# EAGLE board test (EAGLE 4.16)
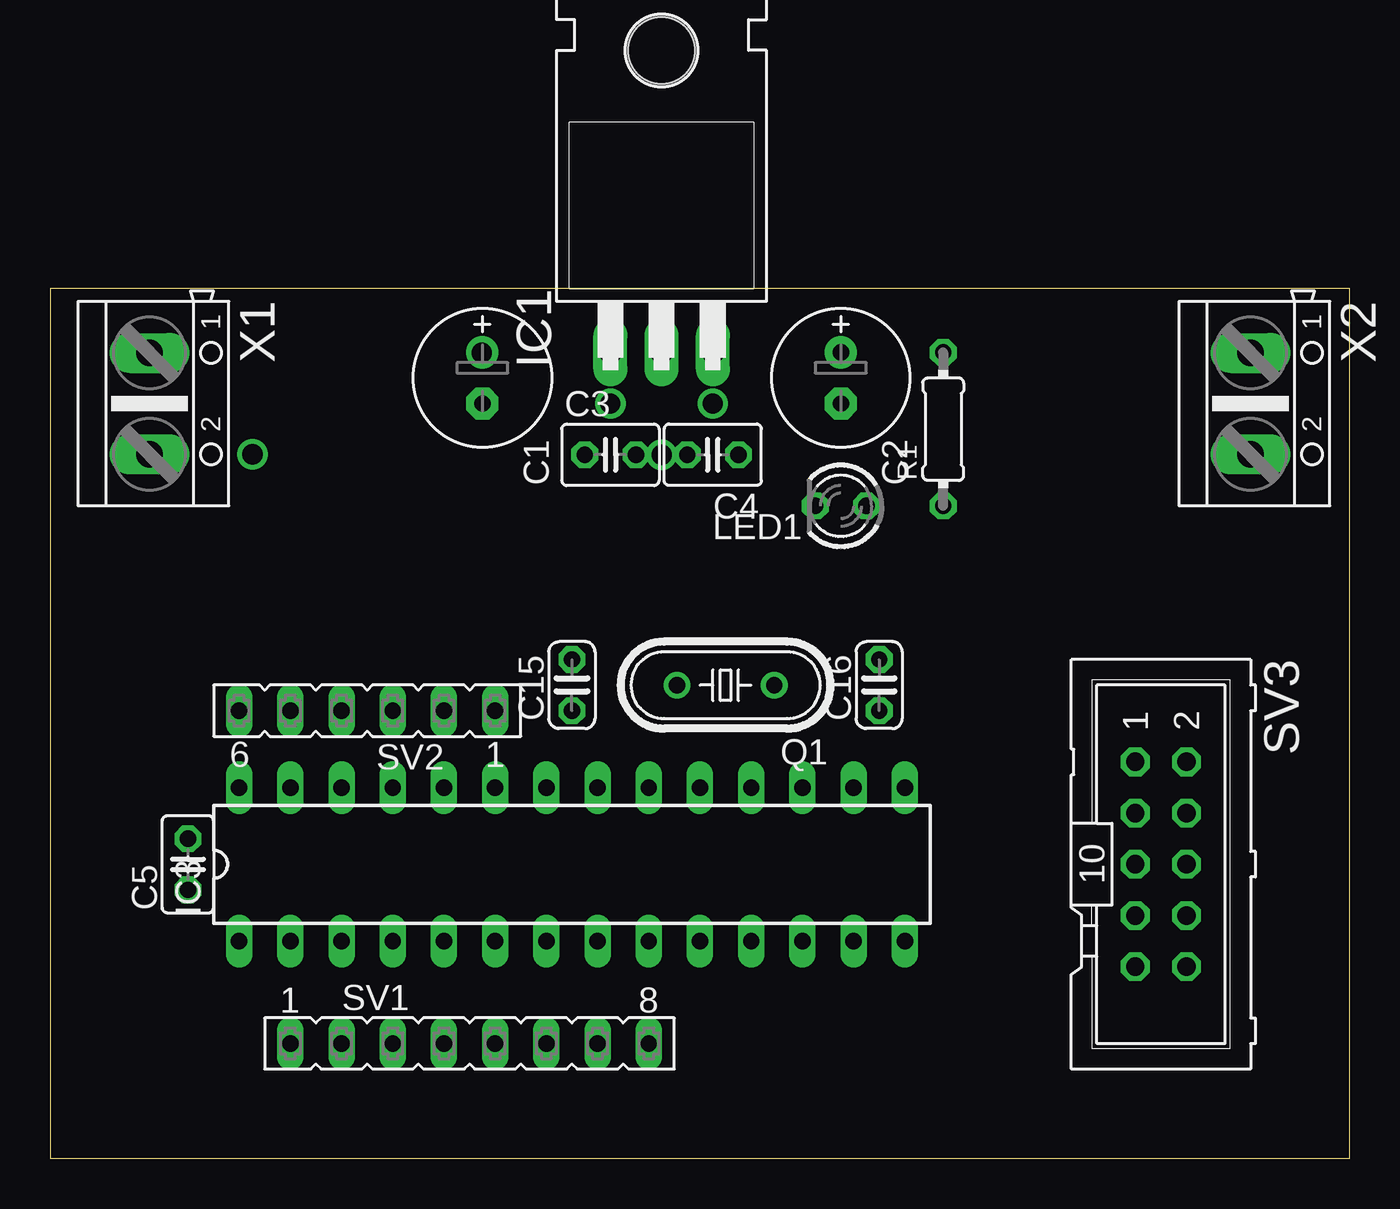
[diagram p0: board, top side]
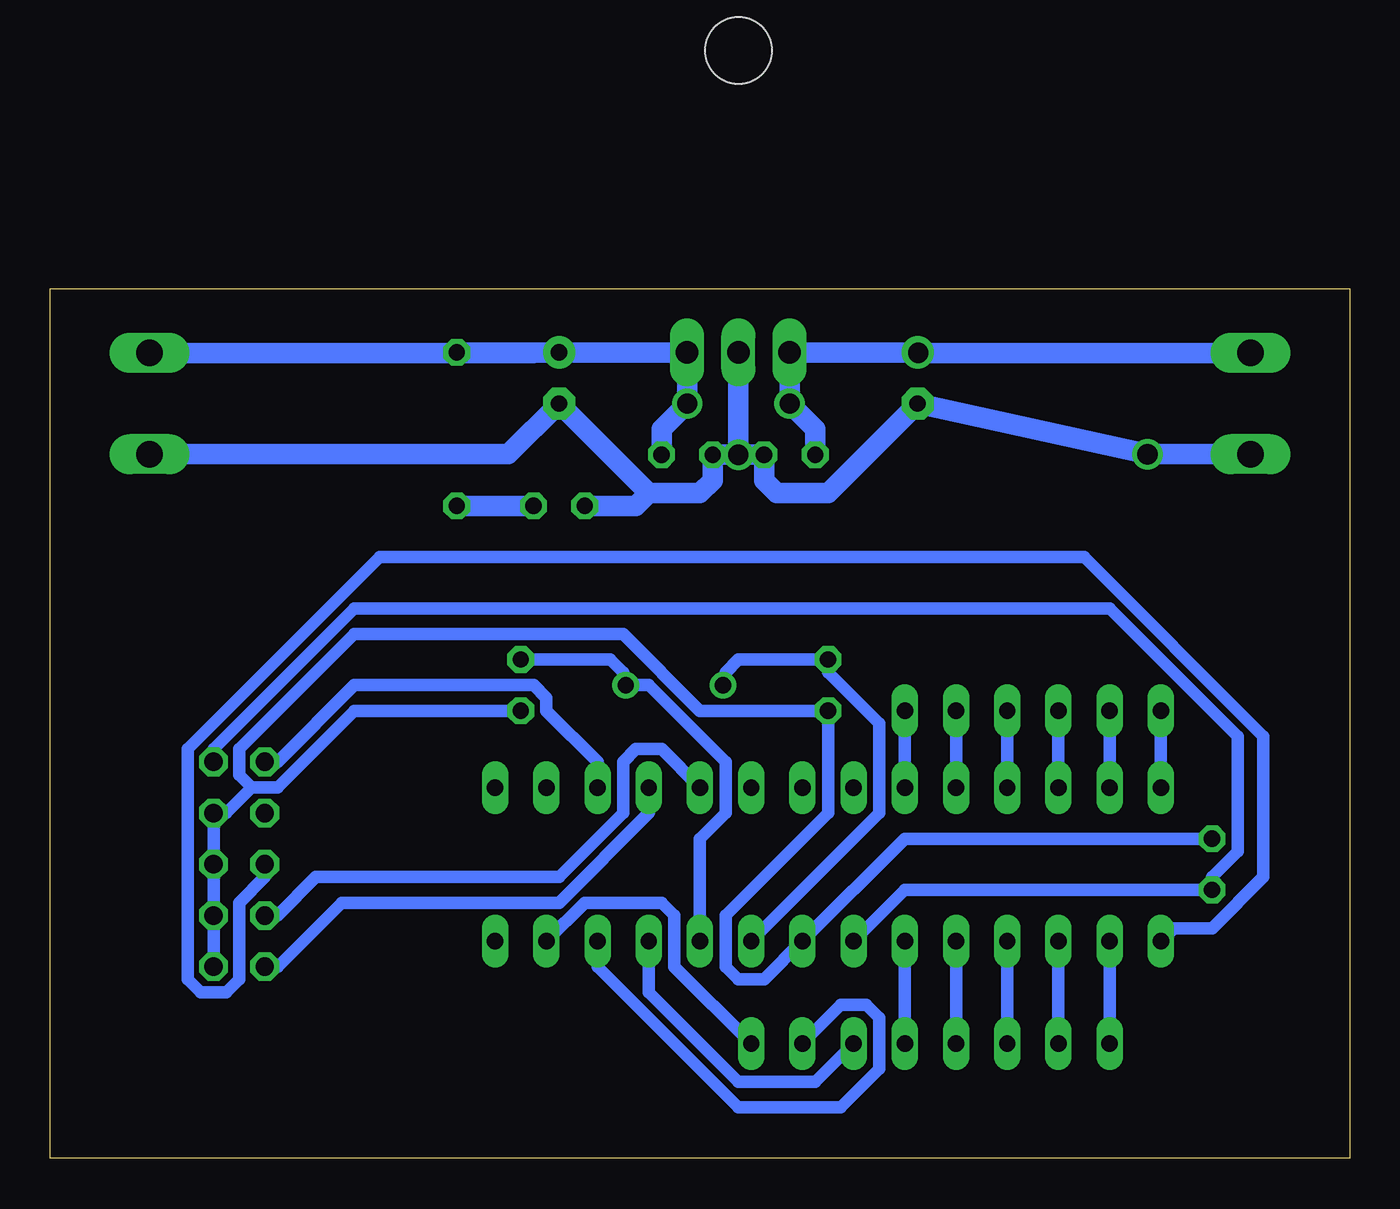
[diagram p1: board, bottom side, seen from below]

Size 64.44 x 43.17 mm. Coordinates in mm from the lower left corner, seen from the top.
Outline: 0,0 64.44,0 64.44,43.17 0,43.17 0,0
Copper layers (1*16): Top 0.035mm / dielectric 1.5mm / Bottom 0.035mm
Design rules "default": minimum track width 24mil, minimum drill 24mil, track to track 8mil, track to pad 8mil, pad to pad 8mil, via to via 8mil, smd to smd 8mil, copper to edge 40mil, drill to drill 8mil, minimum pad ring 10mil, minimum via ring 8mil, stop-mask expansion 4mil, vias tented up to drill 0mil, thermal gap 10mil

## Footprints (pad centres in the part's own frame; a part is rotated, then mirrored left to right if it is on the bottom)
E2,5-7 = drill 0.813 pad 1.6 round: + -1.27,0 | drill 0.813 pad 1.6 octagon: - 1.27,0
C025-030X050 = drill 0.813 octagon: 1 -1.27,0; 2 1.27,0
C025-025X050 = drill 0.813 octagon: 1 -1.27,0; 2 1.27,0
C025-024X044 = drill 0.813 octagon: 1 -1.27,0; 2 1.27,0
TO220H = drill 1.118 long: 1 -2.54,-10.16; 2 0,-10.16; 3 2.54,-10.16 | hole 3.302: 0,4.826
DIL28-3 = drill 0.813 long: 1 -16.51,-3.81; 2 -13.97,-3.81; 3 -11.43,-3.81; 4 -8.89,-3.81; 5 -6.35,-3.81; 6 -3.81,-3.81; 7 -1.27,-3.81; 8 1.27,-3.81; 9 3.81,-3.81; 10 6.35,-3.81; 11 8.89,-3.81; 12 11.43,-3.81; 13 13.97,-3.81; 14 16.51,-3.81; 15 16.51,3.81; 16 13.97,3.81; 17 11.43,3.81; 18 8.89,3.81; 19 6.35,3.81; 20 3.81,3.81; 21 1.27,3.81; 22 -1.27,3.81; 23 -3.81,3.81; 24 -6.35,3.81; 25 -8.89,3.81; 26 -11.43,3.81; 27 -13.97,3.81; 28 -16.51,3.81
LED3MM = drill 0.813 octagon: A -1.27,0; K 1.27,0
HC49/S = drill 0.813 round: 1 -2.413,0; 2 2.413,0
0204/7 = drill 0.813 octagon: 1 -3.81,0; 2 3.81,0
FE08 = drill 0.813 long: 1 -8.89,0; 2 -6.35,0; 3 -3.81,0; 4 -1.27,0; 5 1.27,0; 6 3.81,0; 7 6.35,0; 8 8.89,0
FE06 = drill 0.813 long: 1 -6.35,0; 2 -3.81,0; 3 -1.27,0; 4 1.27,0; 5 3.81,0; 6 6.35,0
ML10 = drill 0.914 octagon: 1 -5.08,-1.27; 2 -5.08,1.27; 3 -2.54,-1.27; 4 -2.54,1.27; 5 0,-1.27; 6 0,1.27; 7 2.54,-1.27; 8 2.54,1.27; 9 5.08,-1.27; 10 5.08,1.27
AK500/2 = drill 1.321 long: 1 -2.515,0; 2 2.515,0

## Placement (x,y rotation side)
C1  10u  [E2,5-7]  21.42,38.73 270 top
C2  1u  [E2,5-7]  39.2,38.73 270 top
C3  100n  [C025-030X050]  27.77,34.92 0 top
C4  100n  [C025-030X050]  32.85,34.92 180 top
C5  100n  [C025-025X050]  6.82,14.6 90 top
C15  22p  [C025-024X044]  25.87,23.49 90 top
C16  22p  [C025-024X044]  41.11,23.49 90 top
IC1  7805T  [TO220H]  30.31,50.16 0 top
IC3  MEGA8-P  [DIL28-3]  25.87,14.6 0 top
LED1  [LED3MM]  39.2,32.38 180 top
Q1  16MHz  [HC49/S]  33.49,23.49 180 top
R1  1k  [0204/7]  44.28,36.19 90 top
SV1  [FE08]  20.79,5.71 0 top
SV2  [FE06]  15.71,22.22 180 top
SV3  [ML10]  55.08,14.6 270 top
X1  [AK500/2]  4.92,37.46 270 top
X2  [AK500/2]  59.52,37.46 270 top

## Library data of the parts
C1-C5 C15 C16 R1 = rcl
IC1 = linear
IC3 = atmel2
LED1 = led
Q1 = crystal
SV1 SV2 = con-lsta
SV3 = con-harting-ml
X1 X2 = con-ptr500

## Nets
+5V: C5.1 IC3.7 SV3.2
+5V1: C2.+ C4.1 IC1.3 R1.2 X2.1
GND: C5.2 C15.1 C16.1 IC3.8 SV3.4 SV3.6 SV3.8 SV3.10
GND1: C1.- C2.- C3.2 C4.2 IC1.2 LED1.K X1.2 X2.2
N$1: C1.+ C3.1 IC1.1 X1.1
N$2: LED1.A R1.1
N$3: IC3.2 SV1.1
N$4: IC3.1 SV3.5
N$5: IC3.3 SV1.2
N$6: IC3.4 SV1.3
N$7: IC3.5 SV1.4
N$8: IC3.6 SV1.5
N$9: IC3.11 SV1.6
N$10: IC3.12 SV1.7
N$11: IC3.13 SV1.8
N$12: IC3.23 SV2.1
N$13: IC3.24 SV2.2
N$14: IC3.19 SV3.7
N$15: IC3.18 SV3.9
N$16: IC3.25 SV2.3
N$17: IC3.26 SV2.4
N$18: IC3.27 SV2.5
N$19: IC3.28 SV2.6
N$22: C15.2 IC3.9 Q1.2
N$23: C16.2 IC3.10 Q1.1
N$31: IC3.17 SV3.1

## Tracks (layer width: path | path; a pad name or v marks a point on that pad's centre or on a via)
+5V
  Bottom 0.61: IC3.7 22.06,13.33 C5.1 6.82,13.97 5.55,15.24 5.55,20.95 11.9,27.3 49.37,27.3 56.35,20.31 SV3.2
+5V1  (via drill 1)
  Bottom 1.016: X2.1 40.5,39.98 C2.+ | C2.+ IC1.3 v32.85,37.46 34.12,36.19 C4.1 | C2.+ R1.2
GND
  Bottom 0.61: SV3.10 SV3.8 SV3.6 SV3.4 55.71,17.14 54.45,18.41 | 54.45,18.41 53.17,18.41 49.37,22.22 C16.1 | C5.2 22.06,15.87 IC3.8 29.04,8.89 30.31,8.89 30.95,9.52 30.95,12.06 25.87,17.14 C15.1 32.22,22.22 36.03,26.03 49.37,26.03 55.08,20.31 55.08,19.04 54.45,18.41
GND1  (via drill 1)
  Bottom 1.016: X1.2 v10.02,34.95 C1.- 25.87,33.02 28.41,33.02 29.04,33.65 C3.2 v30.31,34.92 | v30.31,34.92 C4.2 31.58,33.65 32.22,33.02 34.76,33.02 | v30.31,34.92 IC1.2 | 34.76,33.02 C2.- 41.72,34.95 X2.2 | LED1.K 35.39,32.38 34.76,33.02
N$1  (via drill 1)
  Bottom 1.016: X1.1 v21.4,39.98 C1.+ IC1.1 v27.77,37.46 26.5,36.19 C3.1
N$2
  Bottom 1.016: LED1.A R1.1
N$3
  Bottom 0.61: SV1.1 IC3.2
N$4
  Bottom 0.61: IC3.1 8.73,11.43 6.82,11.43 4.28,13.97 4.28,20.95 13.17,29.84 48.09,29.84 57.62,20.31 57.62,8.89 56.98,8.25 55.71,8.25 55.08,8.89 55.08,12.7 53.81,13.97 SV3.5
N$5
  Bottom 0.61: SV1.2 IC3.3
N$6
  Bottom 0.61: SV1.3 IC3.4
N$7
  Bottom 0.61: SV1.4 IC3.5
N$8
  Bottom 0.61: SV1.5 IC3.6
N$9
  Bottom 0.61: SV1.6 26.5,3.8 30.31,3.8 34.76,8.25 IC3.11
N$10
  Bottom 0.61: SV1.7 25.23,7.62 23.96,7.62 23.33,6.98 23.33,4.44 25.23,2.54 30.31,2.54 37.3,9.52 IC3.12
N$11
  Bottom 0.61: SV1.8 33.49,9.52 33.49,12.06 34.12,12.7 37.94,12.7 IC3.13
N$12
  Bottom 0.61: IC3.23 SV2.1
N$13
  Bottom 0.61: IC3.24 SV2.2
N$14
  Bottom 0.61: IC3.19 34.12,20.31 35.39,20.31 36.03,19.68 36.03,17.14 39.2,13.97 51.27,13.97 53.17,12.06 SV3.7
N$15
  Bottom 0.61: IC3.18 34.76,17.14 39.2,12.7 50,12.7 53.17,9.52 SV3.9
N$16
  Bottom 0.61: IC3.25 SV2.3
N$17
  Bottom 0.61: IC3.26 SV2.4
N$18
  Bottom 0.61: IC3.27 SV2.5
N$19
  Bottom 0.61: IC3.28 SV2.6
N$22
  Bottom 0.61: Q1.2 30.95,24.12 30.31,24.76 C15.2 25.87,24.12 23.33,21.58 23.33,17.14 IC3.9
N$23
  Bottom 0.61: IC3.10 32.22,15.87 30.95,17.14 30.95,19.68 34.76,23.49 Q1.1 36.03,24.12 36.66,24.76 C16.2
N$31
  Bottom 0.61: IC3.17 37.3,19.68 39.84,22.22 39.84,22.86 40.48,23.49 49.37,23.49 53.17,19.68 SV3.1